# Altium PCB PCB3.PcbDoc
Units mil, origin at the board's own origin, x right, y up, seen from the top; angles counter-clockwise.
Board outline 1850 x 2630 mil, 2 copper layers (Top Layer, Bottom Layer); 16 components, 10 nets, 36 pads, 0 vias.
Unrouted connection lines stored in the file: 9.
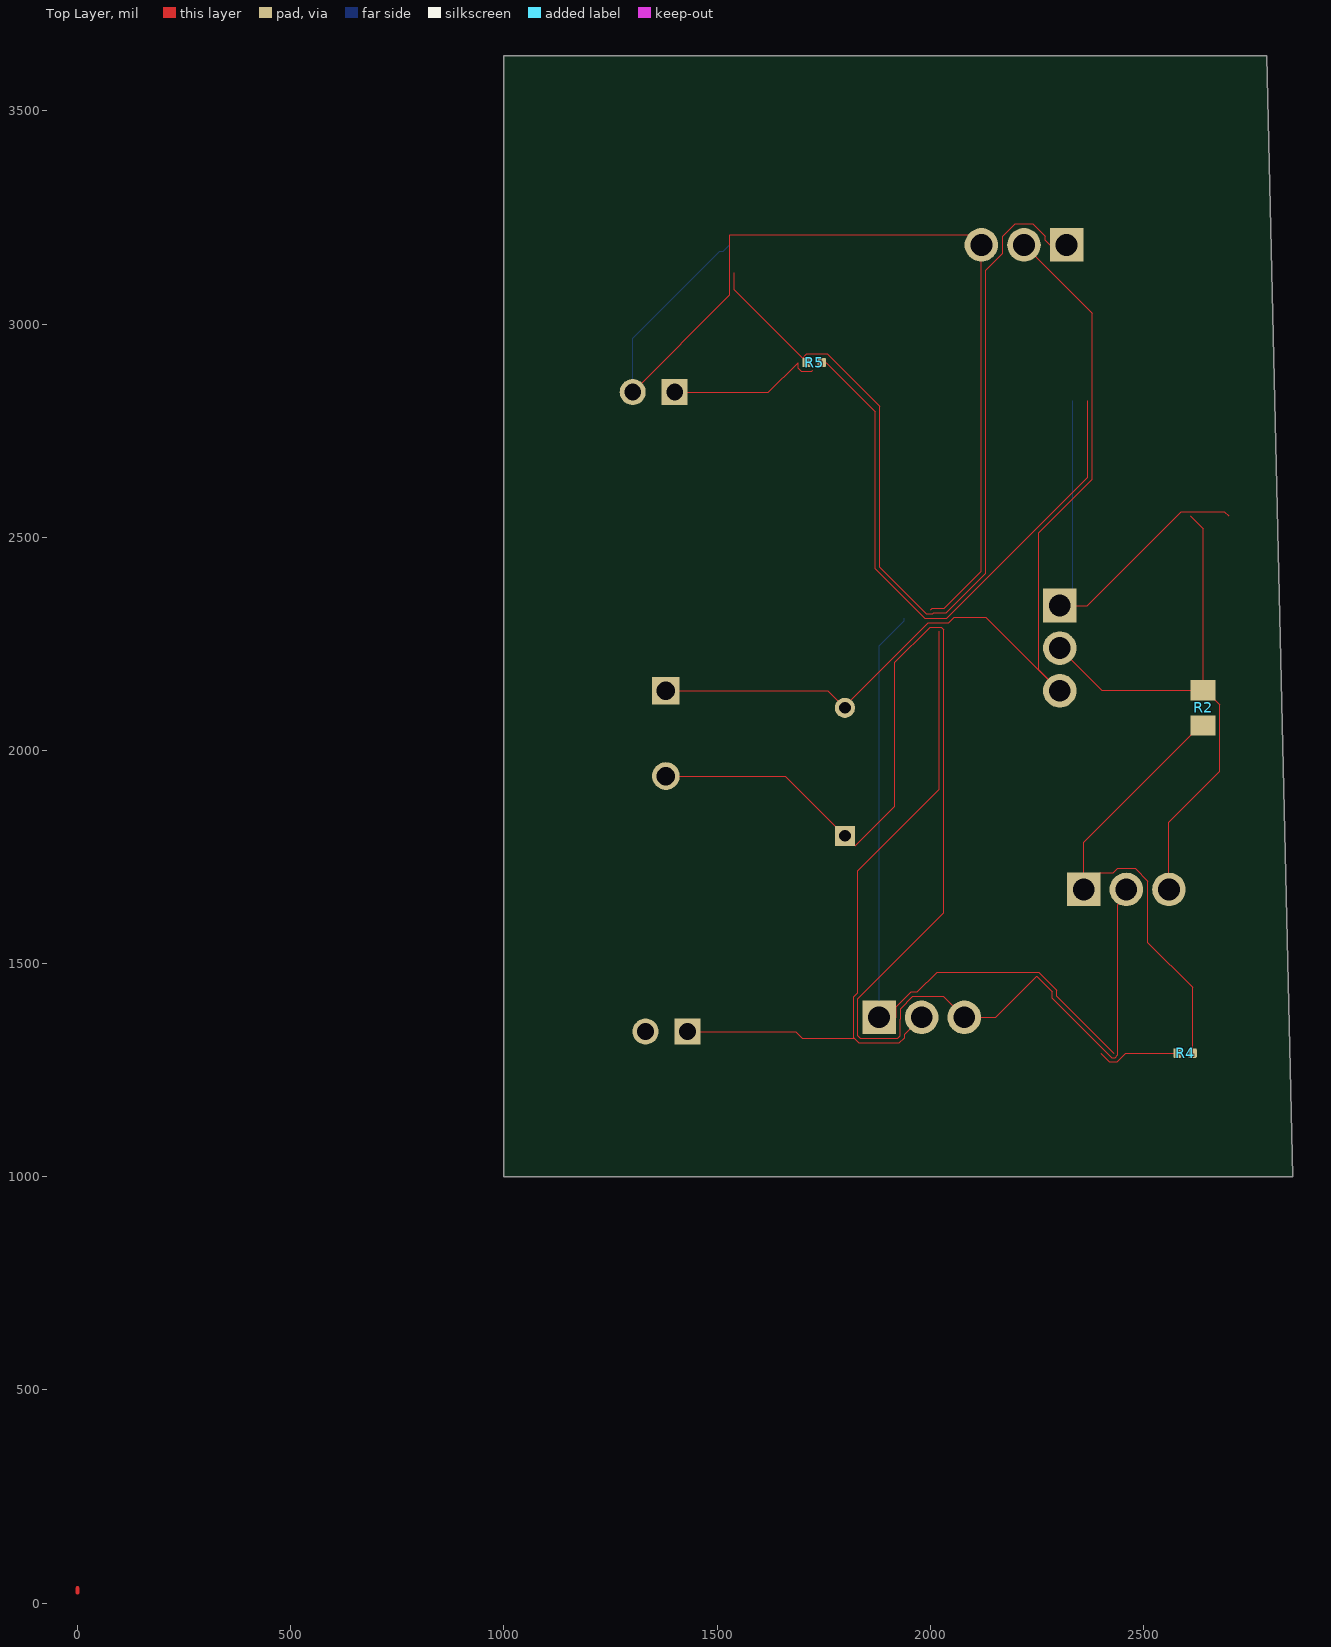
[diagram p0: Top Layer view]
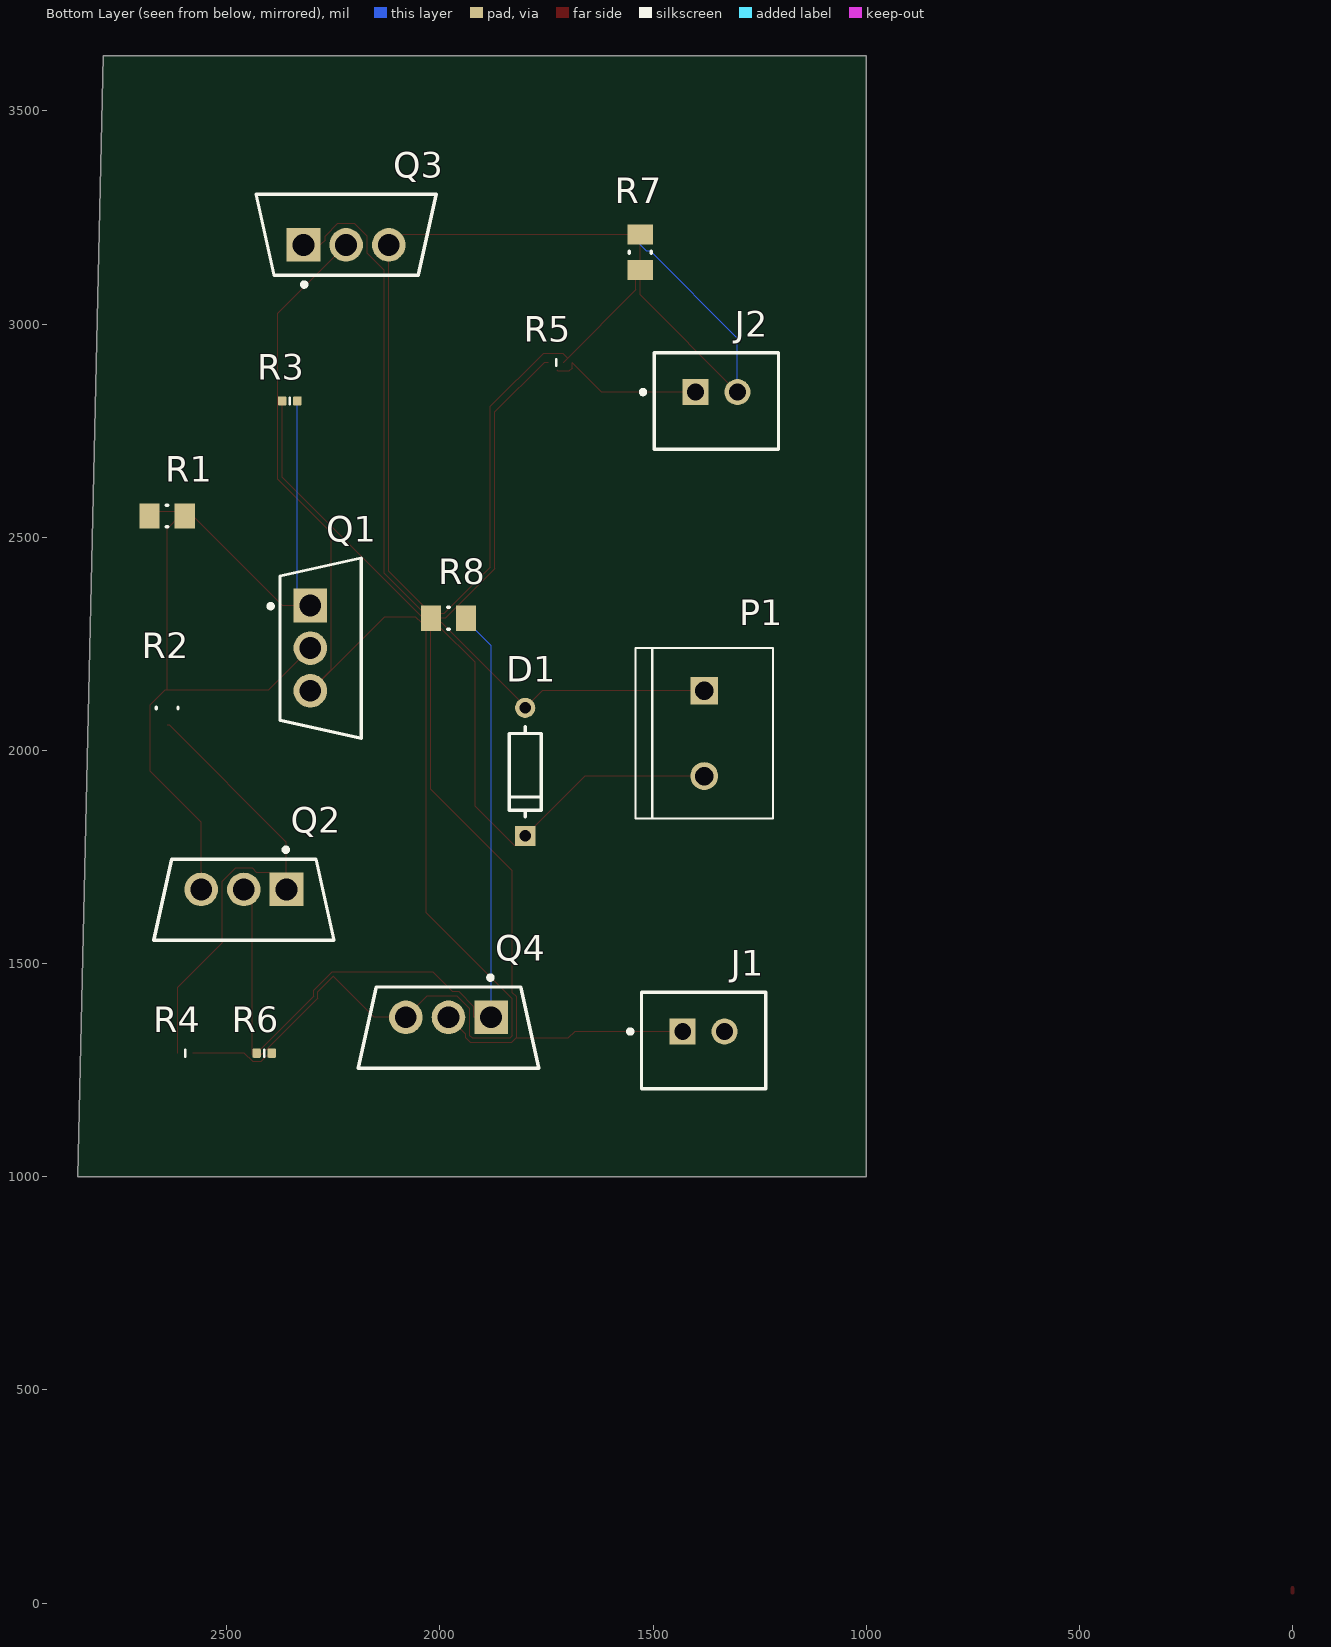
[diagram p1: Bottom Layer view, seen from below]
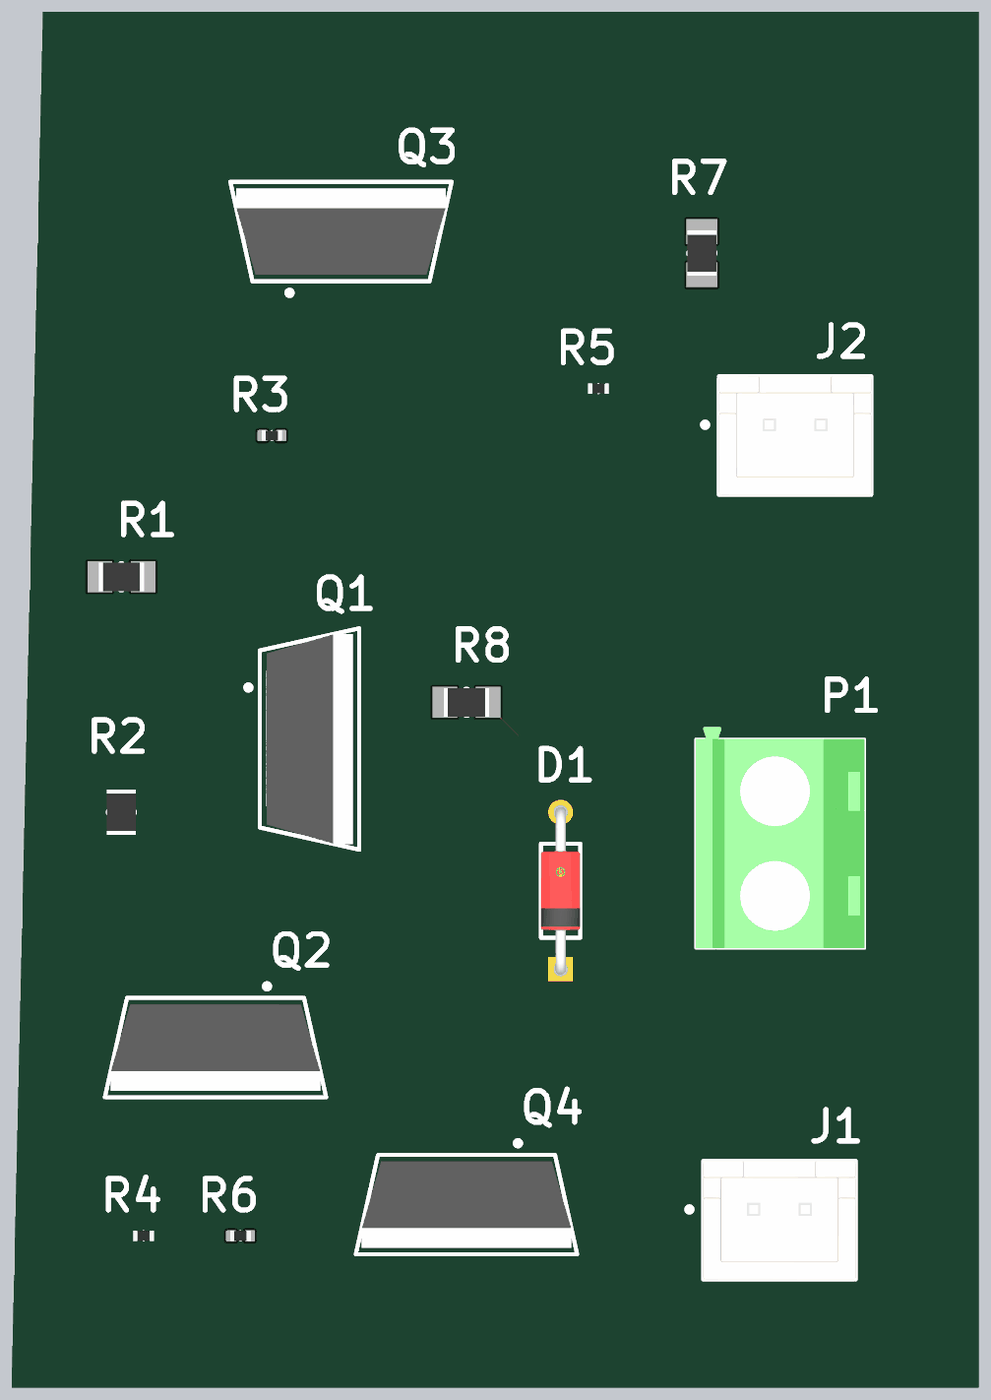
[diagram p2: 3D render of the assembled board from below, using the file's embedded part models]

## Layer stack, top to bottom
Top Solder: solder mask 0.4, Solder Resist, Dk 3.5
Top Layer: signal copper 1.4
Dielectric 1: dielectric 12.6, FR-4, Dk 4.8
Bottom Layer: signal copper 1.4
Bottom Solder: solder mask 0.4, Solder Resist, Dk 3.5

## Board outline
1000,1000 2850,1000 2790,3630 1000,3630

## Design rules (kind name [scope] priority, off if disabled: settings)
Clearance [All] p1: gap=10 ignorepadtopadclearanceinfootprint=FALSE
PolygonConnect [All] p1: connectstyle=Relief reliefconductorwidth=10 reliefentries=4 polygonreliefangle="90 Angle" airgapwidth=10
RoutingVias [All] p1: holewidth=28 width=50 viastyle="Through Hole" minholewidth=28 minwidth=50 maxholewidth=28 maxwidth=50
SolderMaskExpansion [All] p1: expansion=4 istentingtop=FALSE
SupplyNets "Schematic Supply Nets_1" [InNet('+12')] p1: voltage=0.000
SupplyNets "Schematic Supply Nets" [InNet('GND')] p2: voltage=0.000
Width [All] p1: maxlimit=0.5 minlimit=0.25 preferedwidth=0.25 minimp=50.000000 maximp=50.000000 favimp=50.000000
30 further rules are at their usual default settings.

## Classes and differential pairs
component class Sheet4: D1 J1 J2 P1 Q1 Q2 Q3 Q4 R1 R2 R4 R6 R7 R8

## Components (designator, comment, footprint, x,y, rotation, side; value= is the part's Value field where it differs from the comment)
D1 "1N5242BTR" FP-017AG-MFG 1800,1949.88 r90 bottom
J1 "B2B-XH-A(LF)(SN)" FP-B2B-XH-A_LF_SN-MFG 1381.46,1320 r180 bottom
J2 "B2B-XH-A(LF)(SN)" FP-B2B-XH-A_LF_SN-MFG 1351.46,2820 r180 bottom
P1 "282837-2" TE_282837-2 1380,2040 r270 bottom
Q1 "IRF4905PBF" FP-PG-TO220-3-MFG 2280,2240 r180 bottom
Q2 "IRF4905PBF" FP-PG-TO220-3-MFG 2460,1650 r270 bottom
Q3 "IRF4905PBF" FP-PG-TO220-3-MFG 2220,3210 r90 bottom
Q4 "IRF4905PBF" FP-PG-TO220-3-MFG 1980,1350 r270 bottom
R1 "Resistor 10k +/-1% 0805 125 mW" RESC2013X50X35ML15T15#1 2640,2550 r180 bottom value=10k
R2 "Resistor 10k +/-1% 0805 125 mW" RESC2013X50X35ML15T15#2 2640,2100 r90 bottom value=10k
R3 "Resistor 100R +/-1 % 0402 63 mW" RESC0402(1005)_L#1 2352.28,2820 r180 bottom value=100
R4 "Resistor 100R +/-1 % 0402 63 mW" RESC0402(1005)_L#2 2597.72,1290 r180 bottom value=100
R5 "Resistor 100R +/-1 % 0402 63 mW" RESC0402(1005)_L#2 1727.72,2910 r180 bottom value=100
R6 "Resistor 100R +/-1 % 0402 63 mW" RESC0402(1005)_L#1 2412.28,1290 r180 bottom value=100
R7 "Resistor 10k +/-1% 0805 125 mW" RESC2013X50X35ML15T15#1 1530,3168.66 r270 bottom value=10k
R8 "Resistor 10k +/-1% 0805 125 mW" RESC2013X50X35ML15T15#1 1980,2310 r180 bottom value=10k

## Footprints (in the part's own frame and the unit in brackets; to place one, negate y for a bottom-side part, rotate by r counter-clockwise, add the part's x,y. Pads: shape width x height; smd on the part's side, far side on the other; paste and mask are expansions set on the pad)
FP-017AG-MFG [mm]
  rect 1.2x1.2 hole 0.7 paste-2539.97 mask+0: 1(-3.813,0)
  round 1.2 hole 0.7 paste-2539.97 mask+0: 2(3.813,0)
  silkscreen extent -2.68,-0.95 2.68,0.95, body extent -4.06,-0.95 4.06,0.95, height 1.91
FP-B2B-XH-A_LF_SN-MFG [mm]
  rect 1.55x1.55 hole 1 paste-2539.97 mask+0: 1(-1.25,0.525)
  round 1.55 hole 1 paste-2539.97 mask+0: 2(1.25,0.525)
  silkscreen extent -4.5,-2.88 3.7,2.88, body extent -3.7,-2.88 3.7,2.88, height 7
FP-PG-TO220-3-MFG [mm]
  rect 2x2 hole 1.3 paste-2539.97 mask+0: 1(-0.61,2.54)
  round 2 hole 1.3 paste-2539.97 mask+0: 2(-0.61,0) 3(-0.61,-2.54)
  silkscreen extent -3.1,-5.38 2.41,5.38, body extent -2.1,-5.1 2.1,5.1, height 19.94
RESC0402(1005)_L#1 [mm] "Chip Resistor, Body 1.0x0.5mm, IPC High Density"
  rrect25% 0.5x0.55 smd: 1(-0.45,0) 2(0.45,0)
  silkscreen extent 0,-0.2 0,0.2, body extent -0.5,-0.25 0.5,0.25, height 0.3
RESC0402(1005)_L#2 [mm] "Chip Resistor, Body 1.0x0.5mm, IPC High Density"
  rrect25% 0.5x0.55 smd far side: 1(-0.45,0) 2(0.45,0)
  silkscreen extent 0,-0.2 0,0.2, body extent -0.5,-0.25 0.5,0.25, height 0.3
RESC2013X50X35ML15T15#1 [mm] "Chip Resistor, 2-Leads, Body 2.2x1.4mm, IPC Low Density"
  rect 1.2x1.5 smd: 1(-1.05,0) 2(1.05,0)
  silkscreen extent -0.05,-0.65 0.05,0.65, body extent -1.1,-0.7 1.1,0.7, height 0.5
RESC2013X50X35ML15T15#2 [mm] "Chip Resistor, 2-Leads, Body 2.2x1.4mm, IPC Low Density"
  rect 1.2x1.5 smd far side: 1(-1.05,0) 2(1.05,0)
  silkscreen extent -0.05,-0.65 0.05,0.65, body extent -1.1,-0.7 1.1,0.7, height 0.5
TE_282837-2 [mm]
  rect 1.65x1.65 / inner round 1.65 / far side rect 1.65x1.65 hole 1.1: 1(-2.54,0)
  round 1.65 hole 1.1: 2(2.54,0)
  silkscreen extent -5.08,-4.1 5.08,4.1, body extent -5.68,-4.1 5.08,4.1, height 10

## Part data
D1: library part CMP-00278-84408833-1, "1N5242BTR 1N5242 Series 500 mW 12 V 200 mA Through Hole Zener Diode - DO-35", Forward Voltage=1.2V, Manufacturer Lifecycle Status=ACTIVE, Max Operating Temperature=200°C, Max Power Dissipation=500mW, Max Reverse Leakage Current=100nA, Min Operating Temperature=-65°C, Peak Reverse Current=1µA, Test Current=20mA, Tolerance=5%, Voltage Rating (DC)=12V, Contact Plating=Tin, Diameter=1.91mm, Element Configuration=Single, ESD Protection=No, Height=6.35mm, Impedance=30Ω, Lead Free="Lead Free", Length=4.56mm, Lifecycle Status=Production, Mount="Through Hole", NexarPartId=84408833, Number of Pins=2, Packaging="Cut Tape (CT)", Power Dissipation=500mW, Power Rating=500mW, Radiation Hardening=No, REACH SVHC="No SVHC", RoHS=Compliant, Schedule B="8541100050, 8541100050", Voltage Tolerance=5%, Weight=80g, Width=6.35mm, Working Voltage=12V, Zener Current=20mA, Zener Voltage=12V
J1 J2: library part CMP-2000-05888-3, "CONN HEADER VERT 2POS 2.5MM", Color=Natural, Contact Resistance=20mR, Current Rating=3A, Housing Color=White, Insulation Resistance=1GR, Max Operating Temperature=85°C, Max Voltage Rating (AC)=250V, Min Operating Temperature=-25°C, Connector Type="Male Pin", Contact Material=Brass, Contact Plating=Tin, Contact Type="Male Pin", Depth=5.75mm, Fastening Type=Detent, Housing Material=Polyamide, Lead Free="Lead Free", Lead Pitch=2.5mm, Length=7.4mm, Max Current Rating=3A, Max Voltage Rating (DC)=250V, Mount="Through Hole", Number of Contacts=2, Number of Positions=2, Number of Rows=1, Orientation=Straight, Packaging=Bulk, Pitch=2.5mm, REACH SVHC="No SVHC", Series=XH, Termination=Solder, Voltage Rating=250V, Voltage Rating (AC)=250V, Wire/Cable Gauge=22AWG
P1: "Ð Ð°Ð·ÑŠÐµÐ¼Ð½Ñ‹Ðµ ÐºÐ»ÐµÐ¼Ð¼Ð½Ñ‹Ðµ ÐºÐ¾Ð»Ð¾Ð´ÐºÐ¸ Ð Ð¾Ð·ÐµÑ‚ÐºÐ° 2 Ð¿Ð¾Ð»Ð¾Ð¶ÐµÐ½Ð¸Ñ 5,08 Ð¼Ð¼ ÐŸÑ€Ð¸Ð¿Ð¾Ð¹ Ð¿Ñ€ÑÐ¼Ð¾Ð¹ Ñ‡ÐµÑ€ÐµÐ· Ð¾Ñ‚Ð²ÐµÑ€ÑÑ‚Ð¸Ðµ 13,5 Ð / ÐºÐ¾Ð½Ñ‚Ð°ÐºÑ‚", Package=None, Availability="In Stock", Check_prices=https://www.snapeda.com/parts/282837-2/TE+Connectivity+AMP+Connectors/view-part/?ref=eda, MF="TE Connectivity", MP=282837-2, Price=None, Purchase-URL=https://pricing.snapeda.com/search/part/282837-2/?ref=eda, SnapEDA_Link=https://www.snapeda.com/parts/282837-2/TE+Connectivity+AMP+Connectors/view-part/?ref=snap
Q1 Q2 Q3 Q4: library part CMP-32901-000200-1, "MOSFET P-CH 55V 74A TO-220AB", Case/Package=TO-220, Continuous Drain Current (ID)=74A, Drain to Source Breakdown Voltage=-55V, Drain to Source Resistance=20mR, Gate to Source Voltage (Vgs)=20V, Input Capacitance=3.4nF, Max Operating Temperature=175°C, Max Power Dissipation=200W, Min Operating Temperature=-55°C, Threshold Voltage=-4V, Drain to Source Voltage (Vdss)=-55V, Element Configuration=Single, Halogen Free="Halogen Free", Height=0.6inch, Lead Free="Lead Free", Length=0.414inch, Max Dual Supply Voltage=-55V, Mount="Through Hole", Number of Pins=3, Packaging=Rail/Tube, Power Dissipation=200W, Rds On Max=20mR, REACH SVHC="No SVHC", RoHS Compliant=Yes, Turn-Off Delay Time=61ns, Turn-On Delay Time=18ns, Width=0.185inch
R1 R2 R7 R8: library part CMP-009-00018-5, "Chip Resistor, 10 KOhm, +/- 1%, 125 mW, -55 to 155 degC, 0805 (2012 Metric)", Case/Package=0805, Max Operating Temperature=155°C, Min Operating Temperature=-55°C, Power=125mW, Tolerance=1%, Voltage Rating=150V, Mounting Technology=SM, Pins=2, RoHS Compliant=True
R3 R4 R5 R6: library part CMP-009-00167-3, "Chip Resistor, 100 Ohms, +/-1 %, 63 mW, -55 to 155 degC, 0402", Case/Package=0402, Max Operating Temperature=155°C, Min Operating Temperature=-55°C, Power=63mW, Tolerance=1%, Pins=2

## Nets (pads, with @x,y where several pads share a name; then routed paths per layer and width w, separated by ;. In a path a pad name is that pad's centre, name@x,y a point inside that pad or via, vN(x,y) a via of type N, cw(c..) or ccw(c..) an arc to the next point about the centre after c; other vN are vias at no path point)
+12: Q1.2 Q2.3 R1.2 R2.2 | length 1334.7
  Top Layer w0.25: Q1.2 2402.68,2141.34 R2.2 ; Q2.3 2560,1831.04 2679.65,1950.69 2679.65,2107.59 2645.91,2141.34 R2.2 ; 2610,2550 2640,2520 R2.2
GND: J1.1 J2.2 Q3.3 Q4.2 R7.1 R8.1 | length 4082.2
  Top Layer w0.25: J2.2 1530,3068.43 1530,3210 2087.8,3210 2111.81,3185.98 Q3.3 2120,2420 2033.51,2333.51 2004.51,2333.51 2001.51,2330.51 ; J1.1 1684.23,1340.67 1700.38,1324.52 1821.93,1324.52 ; Q4.2 1939.75,1333.77 1939.75,1326.2 1927.81,1314.26 1832.19,1314.26 1821.93,1324.52 ; 2021.5,2279.24 2021.5,1909.09 1830.5,1718.1 1830.5,1432.08 1820.25,1421.83 1820.25,1326.2 1821.93,1324.52
  Bottom Layer w0.25: J2.2 1302.24,2967.04 1505.77,3170.57 1514.57,3170.57 1530,3186 R7.1
MUC1: J2.1 R3.1 R5.1 | length 1775.6
  Top Layer w0.25: J2.1 1620.7,2840.67 1690.03,2910 1690.03,2896.42 1697.4,2889.05 1722.6,2889.05 1724.85,2891.3 ; R5.1 1755.66,2910 1871.33,2794.33 1871.33,2425.67 1987,2310 2039,2310 2370,2641 2370,2820
NetD1_1: D1.1 P1.2 Q2.2 Q4.3 | length 3405.7
  Top Layer w0.25: P1.2 1659.76,1940 D1.1 1823.85,1775.91 1824.06,1775.91 1917.11,1868.95 1917.11,2206.7 1999.89,2289.49 2025.75,2289.49 2031.75,2283.49 2031.75,1618.83 1830.5,1417.58 1830.5,1330.45 1836.44,1324.52 1923.56,1324.52 1929.5,1330.45 1929.5,1369.26 1930.5,1370.27 1930.5,1394.52 1959.5,1423.51 2030.5,1423.51 Q4.3 2154.02,1374.02 2249.89,1469.89 2250.11,1469.89 2286.23,1433.77 2286.23,1419.27 2425.75,1279.75 2434.25,1279.75 2440.25,1285.75 2440.25,1637.55 2460,1657.29 Q2.2
NetD1_2: D1.2 P1.1 Q1.3 Q3.2 | length 2287.8
  Top Layer w0.25: P1.1 1760,2140 D1.2 1800,2104.1 1995.65,2299.75 2043.25,2299.75 2056.51,2313 2130.29,2313 2303.3,2140 Q1.3 2254.52,2189.5 2254.52,2511.01 2380.25,2636.75 2380.25,3025.73 Q3.2
NetQ1_1: Q1.1 R1.1 R3.2 | length 984.1
  Top Layer w0.25: Q1.1 2368.63,2340 2588.88,2560.25 2689.75,2560.25 2700,2550
  Bottom Layer w0.25: Q1.1 2334.57,2370.55 R3.2
NetQ2_1: Q2.1 R2.1 R4.1 | length 1134.5
  Top Layer w0.25: R4.1 2615.43,1444.55 2510.5,1549.48 2510.5,1693.51 2480.5,1723.51 2439.5,1723.51 2429.24,1713.26 2399.24,1713.26 Q2.1 2360,1784.57 2634.09,2058.66 R2.1
NetQ3_1: Q3.1 R5.2 R7.2 | length 2223.2
  Top Layer w0.25: 1540.25,3120 1540.25,3080.73 1705.3,2915.68 1710,2910.98 R5.2 ; 1700.61,2920.38 1700.61,2920.59 1710.98,2930.95 1758.03,2930.95 1881.89,2807.09 1881.89,2429.61 1991.25,2320.25 2005.75,2320.25 2008.76,2323.26 2037.76,2323.26 2130.25,2415.75 2130.25,3126.24 2170,3165.98 2170,3205.98 2199.5,3235.48 2240.5,3235.48 2269.5,3206.49 2269.5,3196.74 2280.25,3185.98 Q3.1
NetQ4_1: Q4.1 R6.1 R8.2 | length 1655.8
  Top Layer w0.25: Q4.1 1919.75,1374.02 1920.25,1374.51 1920.25,1398.77 1955.25,1433.77 1969.75,1433.77 2016.24,1480.25 2254.25,1480.25 2296.49,1438.01 2296.49,1423.51 2430,1290
  Bottom Layer w0.25: Q4.1 1880,2245.43 1938.66,2304.09 R8.2
NetR4_2: R4.2 R6.2 | length 197
  Top Layer w0.25: 2400,1290 2420.51,1269.49 2438.49,1269.49 2459,1290 R4.2
pads on no net: J1.2
copper on no net: | length 20
  Top Layer w10: 0,25 0,35 0,25